# Altium PCB PCB.PcbDoc
Units mil, origin at the board's own origin, x right, y up, seen from the top; angles counter-clockwise.
Board outline 2800 x 2100 mil, 4 copper layers (Top Layer, Int1 (GND), Int2 (PWR), Bottom Layer), stack 53.912 mil thick; 61 components, 48 nets, 247 pads, 69 vias.
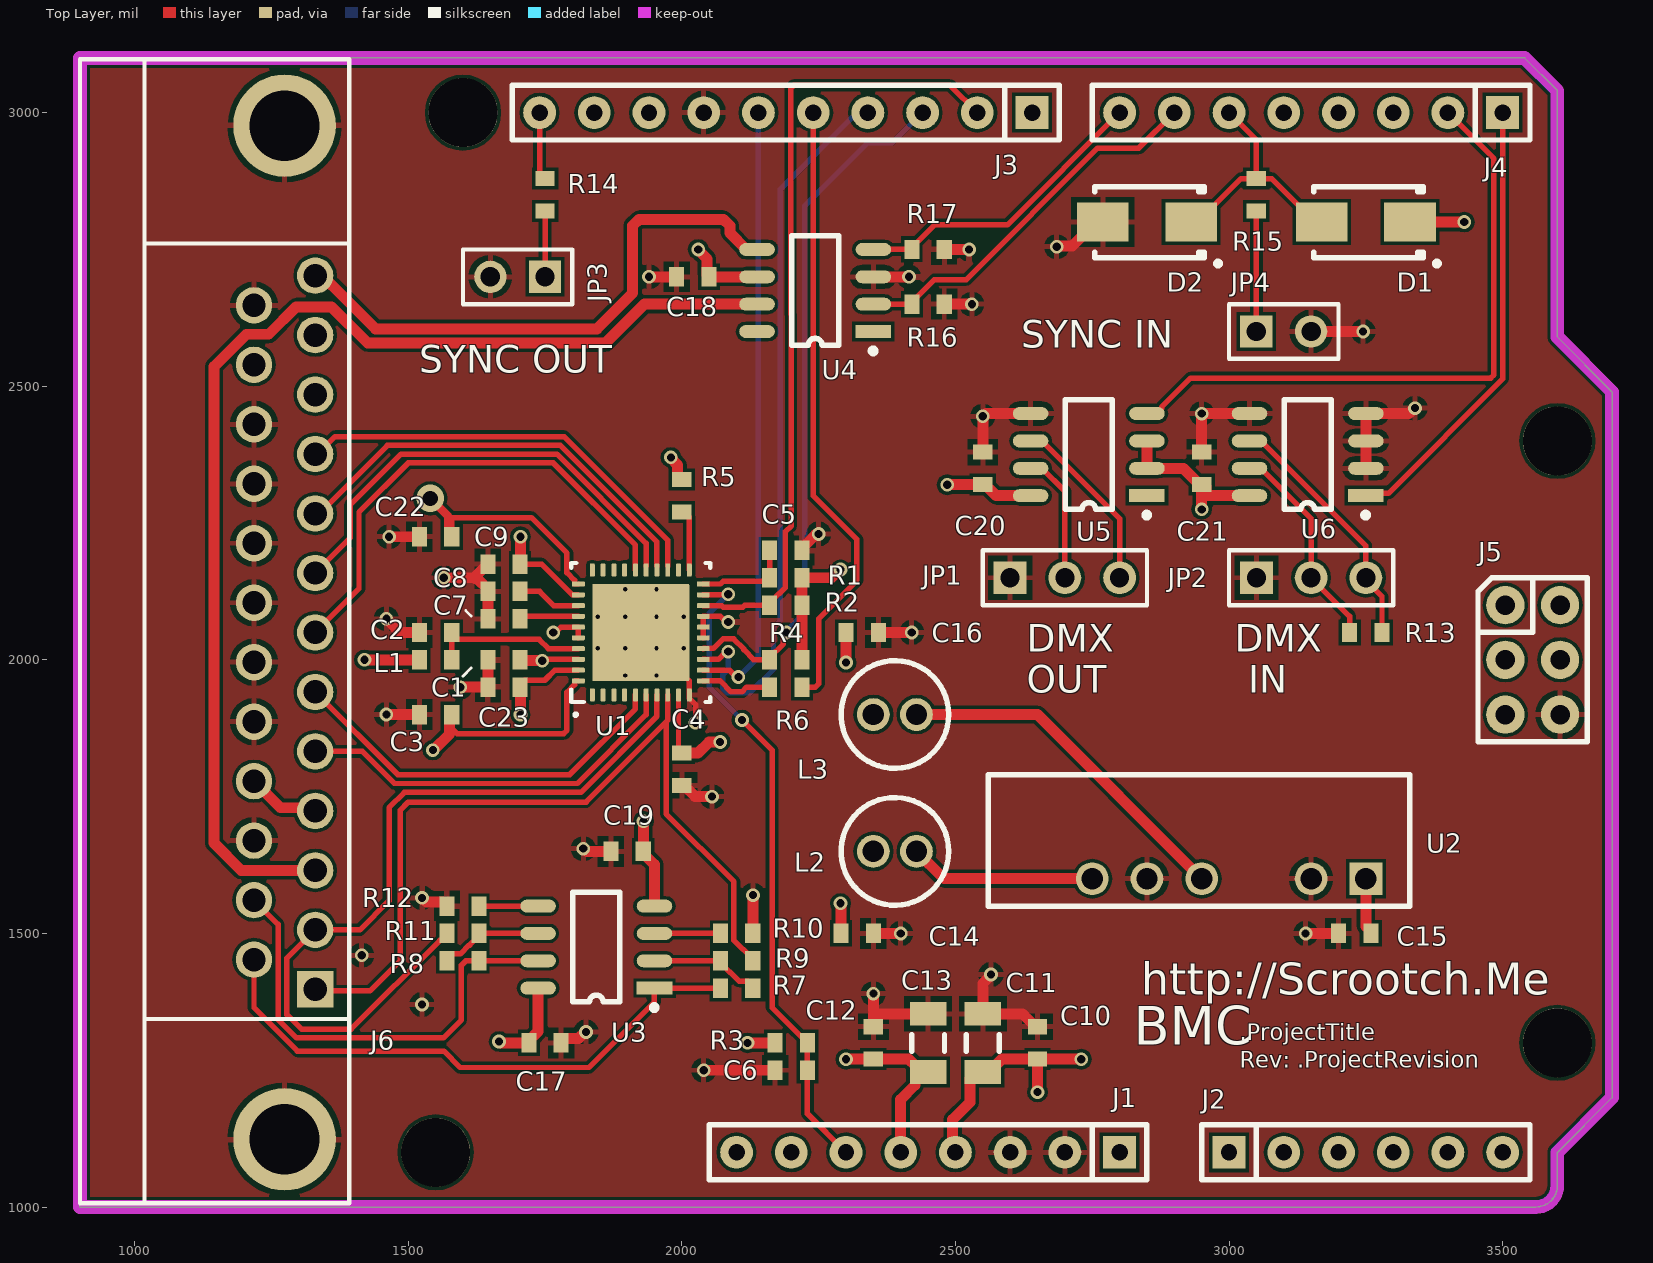
[diagram p0: Top Layer view]
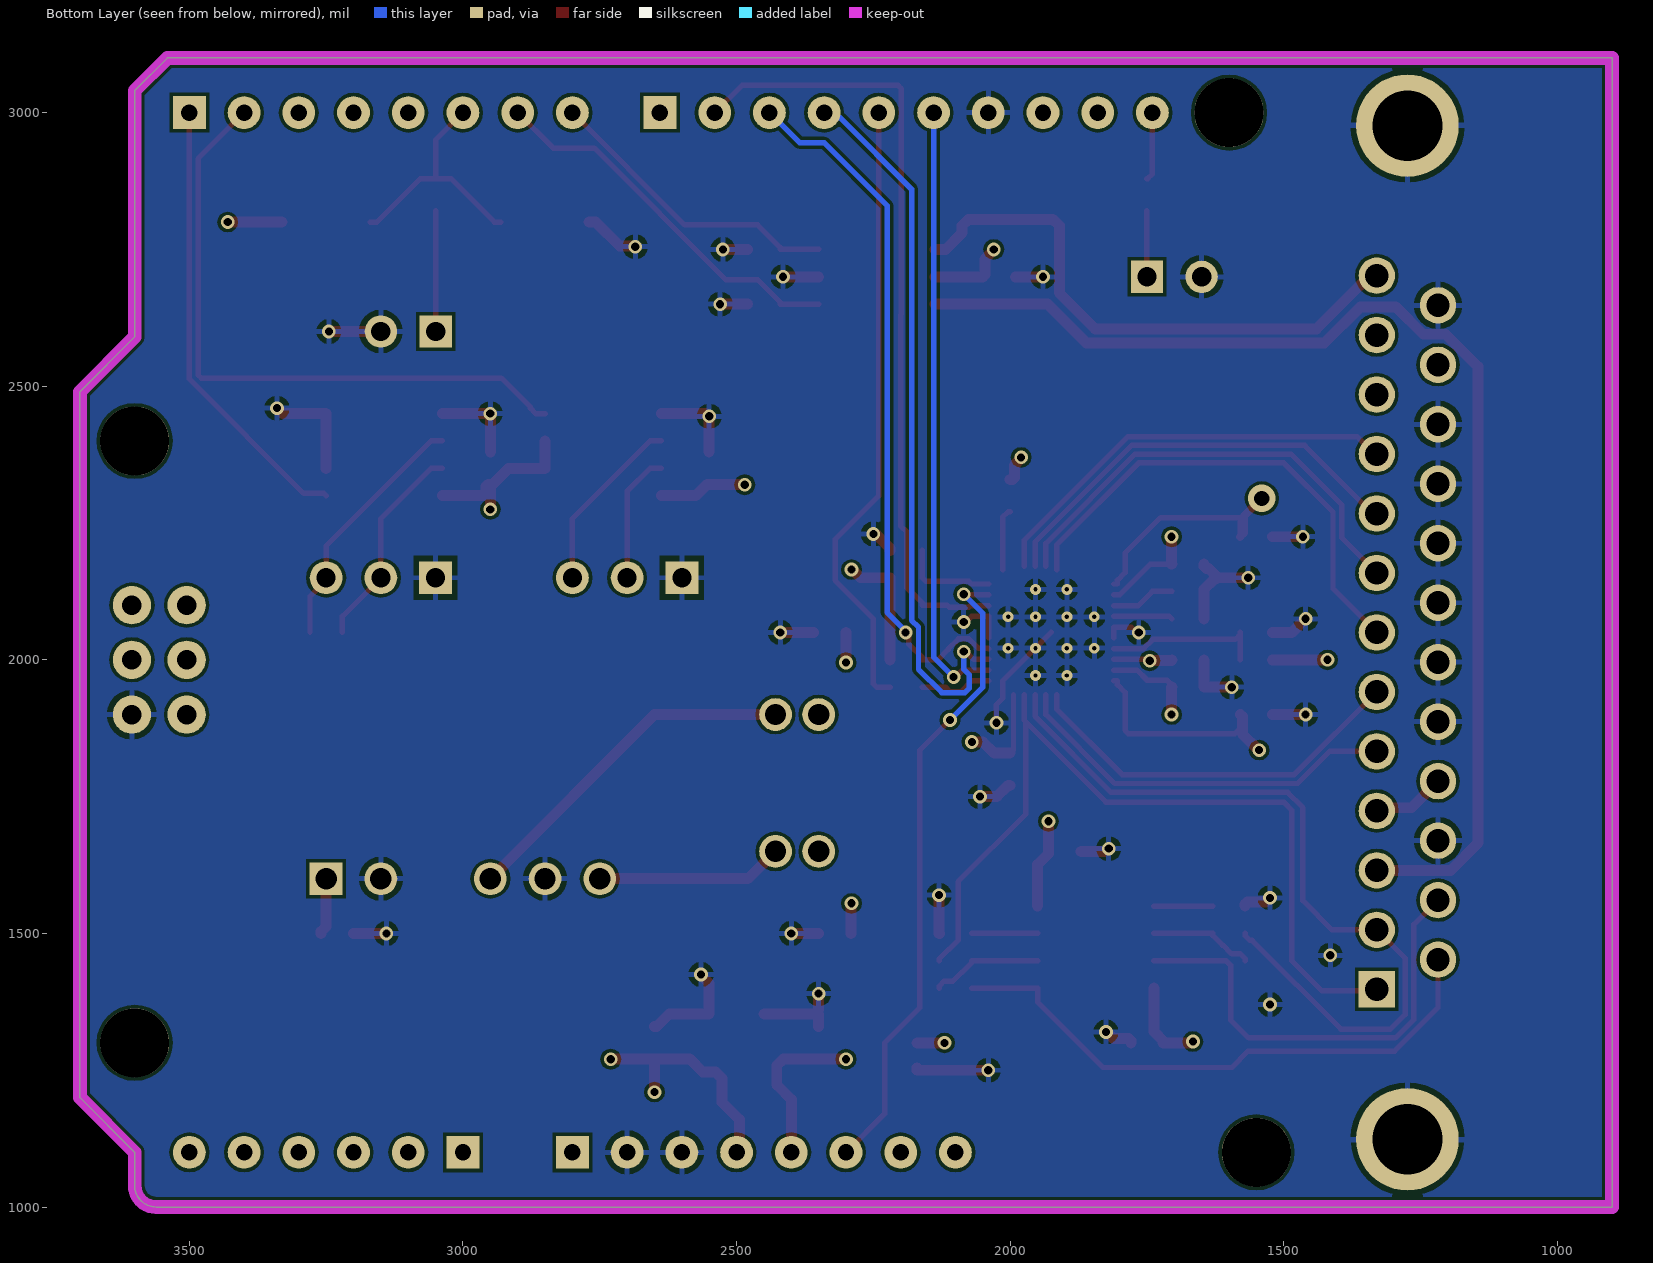
[diagram p1: Bottom Layer view, seen from below]
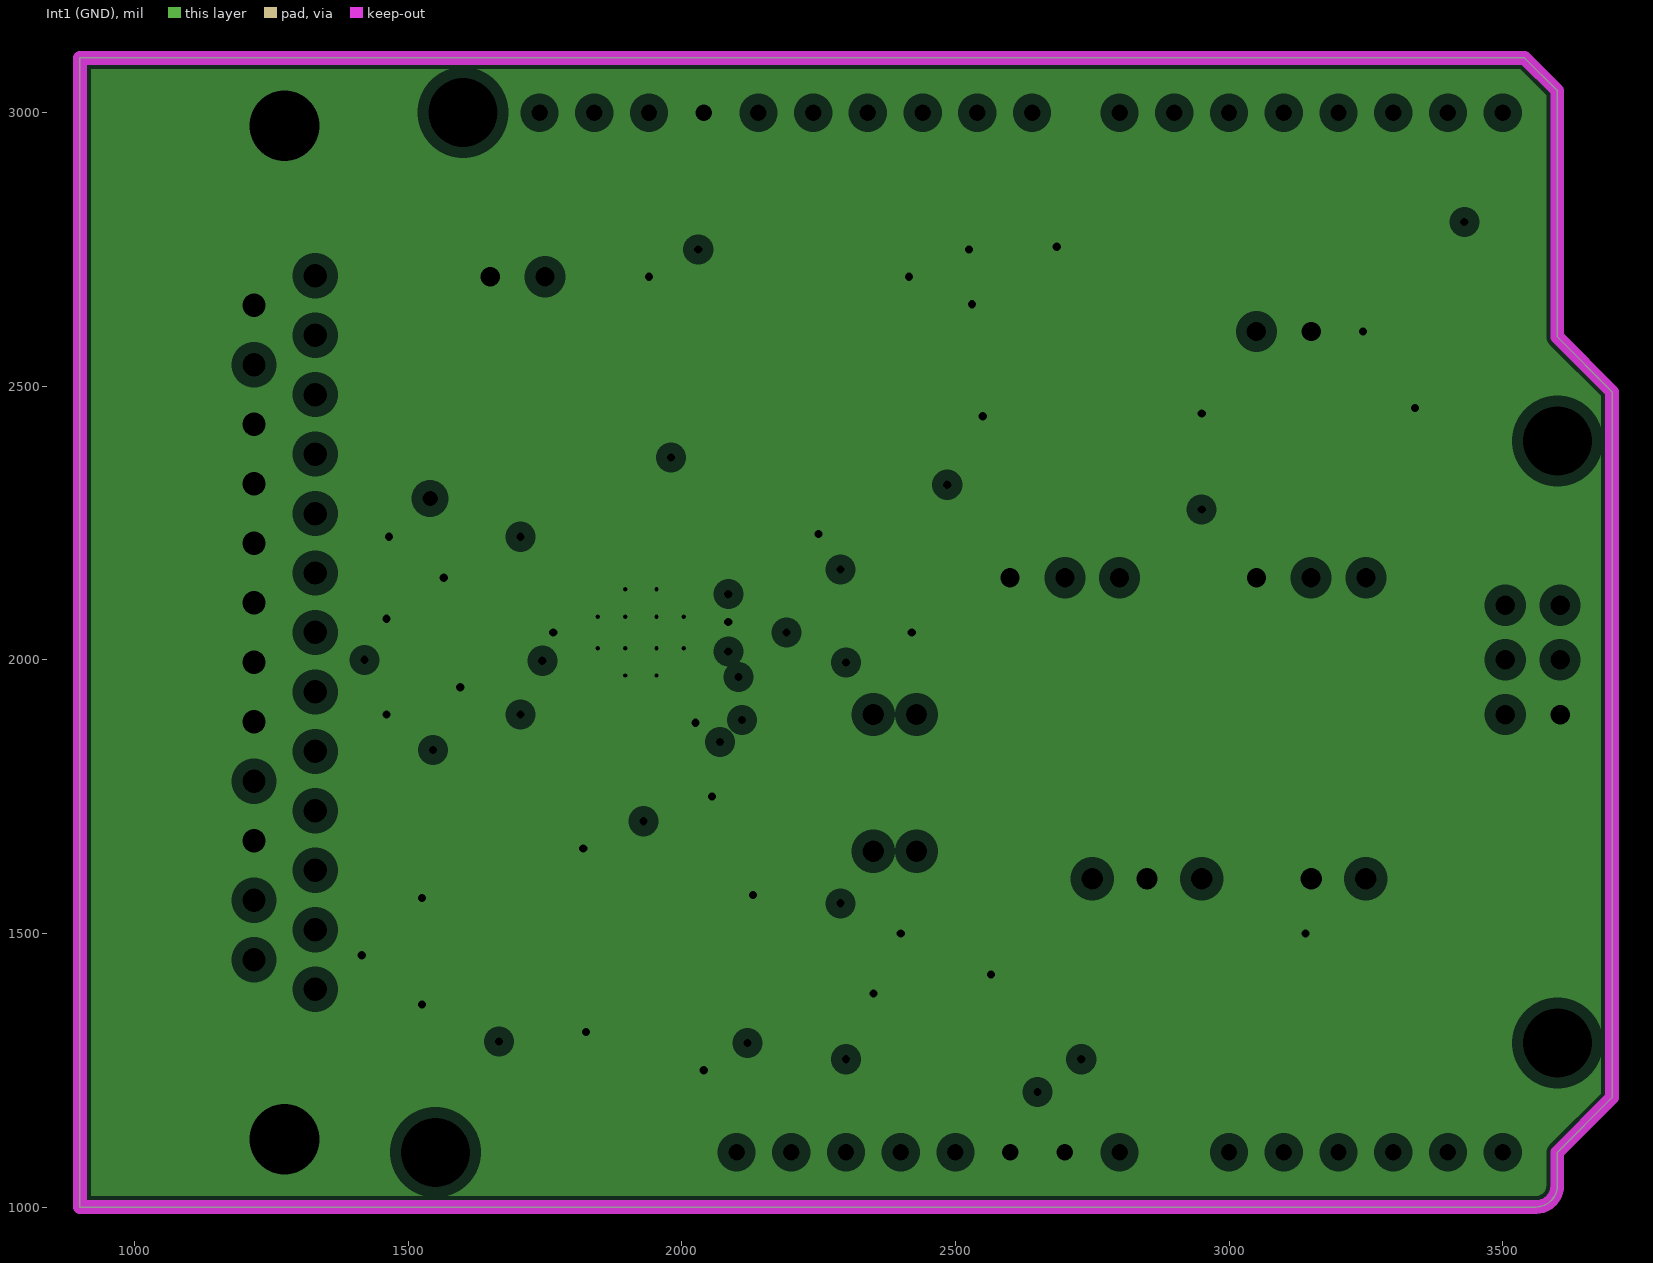
[diagram p2: Int1 (GND), clearances drawn from the general rule]
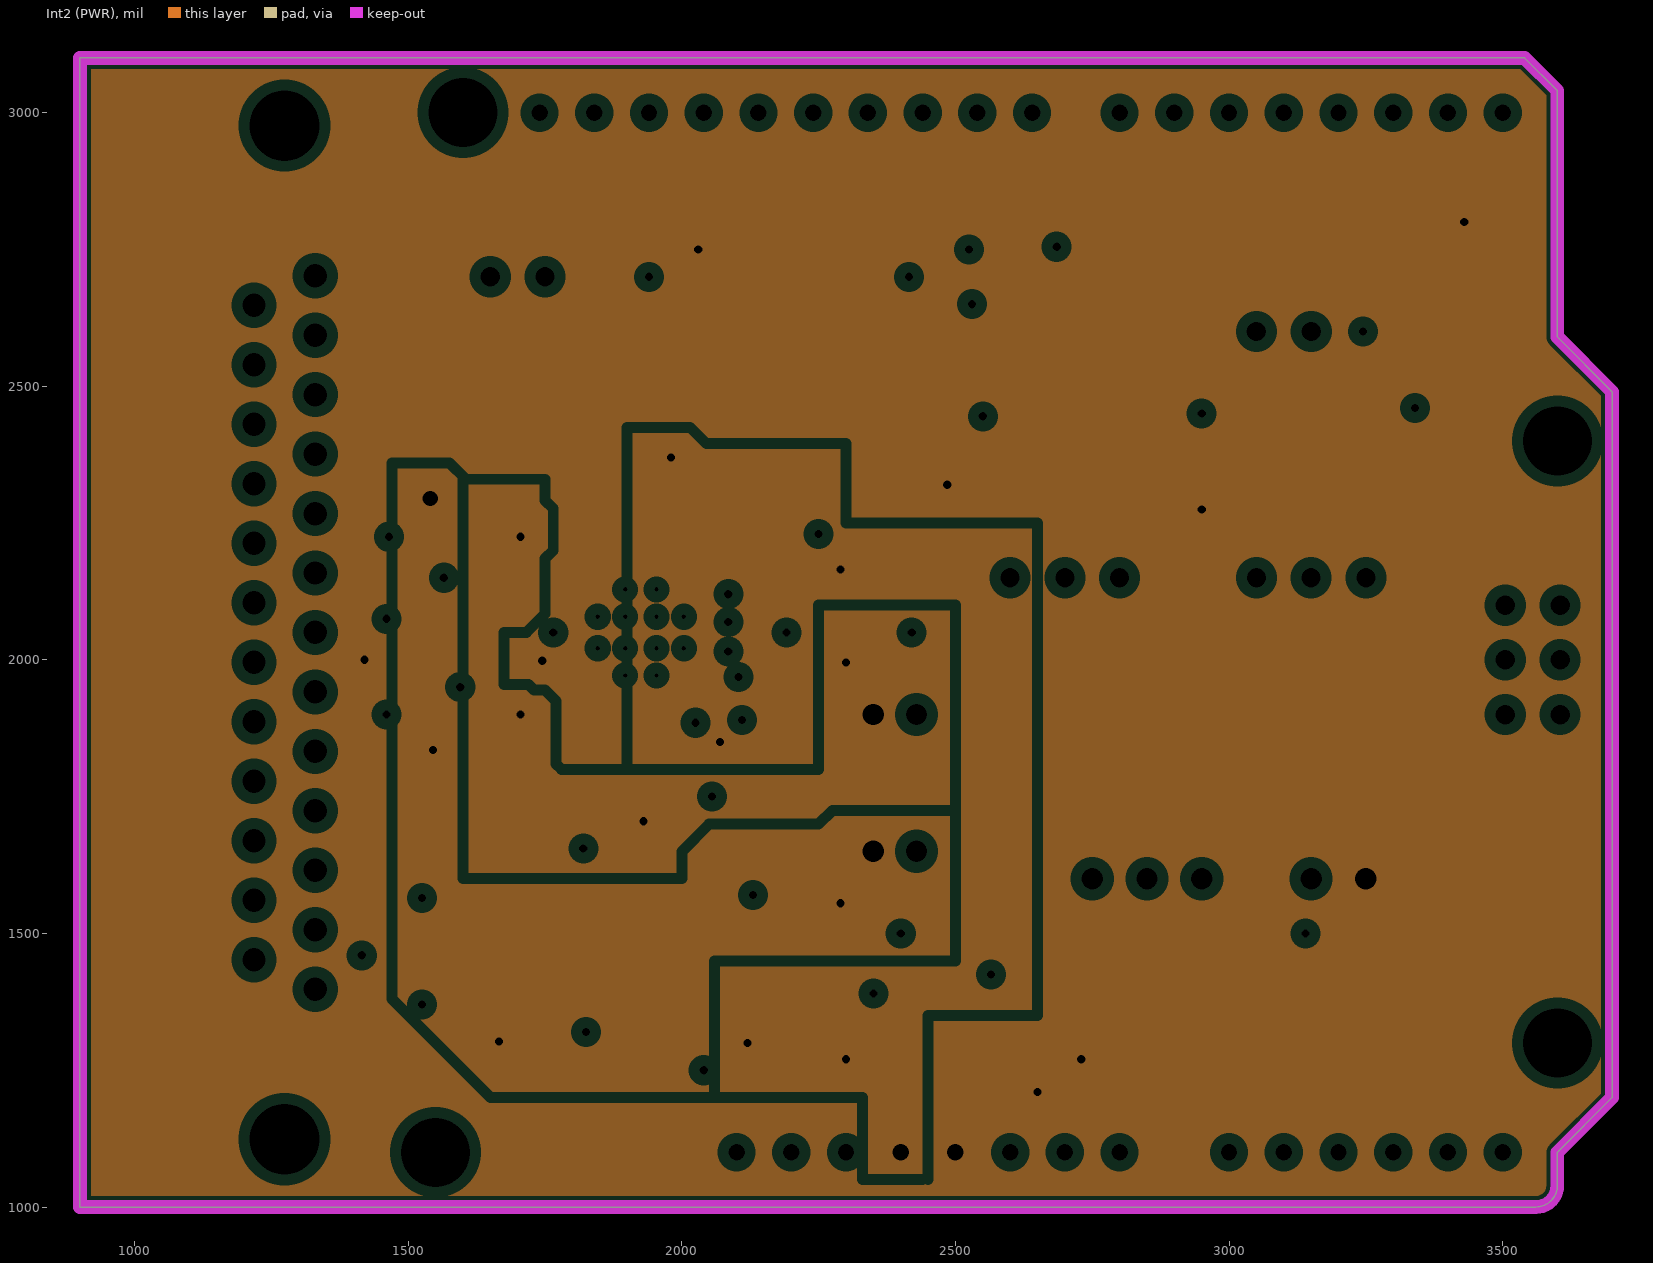
[diagram p3: Int2 (PWR), clearances drawn from the general rule]

## Layer stack, top to bottom
Top Solder: solder mask 1, SM-001, Dk 4
Top Layer: signal copper 1.378
Dielectric 1: prepreg 5.1, PP-017, Dk 4.3
Dielectric 2: prepreg 5.1, PP-017, Dk 4.3
Int1 (GND): plane copper 1.378, net GND
Dielectric 3: core 28, Core-039, Dk 4.8
Int2 (PWR): plane copper 1.378, net (Multiple Nets)
Dielectric 4: prepreg 5.1, PP-017, Dk 4.3
Dielectric 5: prepreg 5.1, PP-017, Dk 4.3
Bottom Layer: signal copper 1.378
Bottom Solder: solder mask 1, SM-001, Dk 4

## Board outline
900,1000 900,3100 3540,3100 3600,3040 3600,2590 3700,2490 3700,1200 3600,1100 3600,1039.37 cw(c3560.63,1039.37) 3560.63,1000

## Design rules (kind name [scope] priority, off if disabled: settings)
Clearance [All] p1: gap=6 ignorepadtopadclearanceinfootprint=FALSE
HoleSize [All] p1: absolutevalues=TRUE maxlimit=130 minlimit=4 maxpercent=80.000 minpercent=20.000
MinimumSolderMaskSliver [All] p1: minsoldermaskwidth=4
PlaneClearance [All] p1: clearance=20
PlaneConnect [All] p1: planeconnectstyle=Relief reliefexpansion=20 reliefentries=4 reliefconductorwidth=10 reliefairgap=10
PolygonConnect [All] p1: connectstyle=Relief reliefconductorwidth=10 reliefentries=4 polygonreliefangle="90 Angle" airgapwidth=10
RoutingVias [All] p1: holewidth=15 width=25 viastyle="Through Hole" minholewidth=7 minwidth=19 maxholewidth=28 maxwidth=50
SilkToSolderMaskClearance [IsPad] p1: minsilkscreentomaskgap=6 clearancetoexposedcopper=TRUE
SolderMaskExpansion "SolderMaskExpansion Via" [IsVia] p1: expansion=-14 istentingtop=FALSE
SolderMaskExpansion [All] p2: expansion=4 istentingtop=FALSE
Width "Width Power" [All] p1: maxlimit=50 minlimit=10 preferedwidth=20
Width [All] p2: maxlimit=20 minlimit=6 preferedwidth=10
25 further rules are at their usual default settings.

## Classes and differential pairs
net class Power: 3V3 5V 9V -9V GND

## Components (designator, comment, footprint, x,y, rotation, side; value= is the part's Value field where it differs from the comment)
C1 ".1uF" C0603 1675,2000 r180 top
C2 "1uF" C0603 1550,2050 r0 top
C3 ".1uF" C0603 1550,1900 r0 top
C4 ".1uF" C0603 2000,1800 r270 top
C5 "1uF" C0603 2190,2200 r180 top
C6 "1uF" C0603 2200,1250 r0 top
C7 "1000pF" C0603 1675,2075 r0 top
C8 ".1uF" C0603 1675,2125 r0 top
C9 ".1uF" C0603 1675,2175 r0 top
C10 ".1uF" C0603 2650,1300 r270 top
C11 "10uF" C1206 2550,1300 r270 top
C12 ".1uF" C0603 2350,1300 r270 top
C13 "10uF" C1206 2450,1300 r270 top
C14 ".47uF" C0603 2320.47,1500 r180 top
C15 ".1uF" C0603 3229.53,1500 r0 top
C16 ".47uF" C0603 2329.53,2050 r0 top
C17 ".1uF" C0603 1750,1300 r180 top
C18 ".1uF" C0603 2020,2700 r180 top
C19 ".1uF" C0603 1900,1650 r0 top
C20 ".1uF" C0603 2550,2350 r90 top
C21 ".1uF" C0603 2950,2350 r90 top
C22 ".1uF" C0603 1550,2225 r0 top
C23 ".1uF" C0603 1675,1950 r0 top
D1 "SS16-E3/61T" SMA 3250,2800 r180 top
D2 "SS16-E3/61T" SMA 2850,2800 r180 top
J1 "SSQ-108-03-G-S" "Header 8x1 8.5mm" 2800,1100 r180 top locked
J2 "SSQ-106-03-G-S" "Header 6x1 8.5mm" 3000,1100 r0 top locked
J3 "SSQ-110-03-G-S" "Header 10x1 8.5mm" 2640,3000 r180 top locked
J4 "SSQ-108-03-G-S" "Header 8x1 8.5mm" 3500,3000 r180 top locked
J5 "SSQ-103-02-G-D" ICSP 3505,2100 r0 top locked
J6 "5745783-4" DSUB25F-RA 900,2050 r90 top
JP1 "3-644456-3" "HEADER 1x3 100mil" 2600,2150 r0 top
JP2 "3-644456-3" "HEADER 1x3 100mil" 3050,2150 r0 top
JP3 "3-644456-2" "HEADER 1x2 100MIL" 1750,2700 r180 top
JP4 "3-644456-2" "HEADER 1x2 100MIL" 3050,2600 r0 top
L1 "742792651" R0603 1550,2000 r0 top
L2 "11R104C" 1100R 2428.74,1650 r180 top value=100uH
L3 "11R104C" 1100R 2428.74,1900 r180 top value=100uH
R1 "10K" R0603 2190,2150 r0 top
R2 "10K" R0603 2190,2100 r0 top
R3 "10K" R0603 2200,1300 r180 top
R4 "10K" R0603 2190,2000 r0 top
R5 "10K" R0603 2000,2300 r90 top
R6 "33" R0603 2190,1950 r180 top
R7 "10K" R0603 2100,1400 r0 top
R8 "10K" R0603 1600,1450 r180 top
R9 "10K" R0603 2100,1450 r180 top
R10 "10K" R0603 2100,1500 r180 top
R11 "10K" R0603 1600,1500 r0 top
R12 "10K" R0603 1600,1550 r0 top
R13 "470" R0603 3250,2050 r180 top
R14 "33" R0603 1750,2850 r270 top
R15 "33" R0603 3050,2850 r90 top
R16 "10K" R0603 2450,2650 r180 top
R17 "10K" R0603 2450,2750 r180 top
U1 "DAC81408RHAT" RHA0040H_V 1925,2050 r90 top
U2 "NMA0509SC" NMA-SIP 3250,1600 r180 top
U3 "TL072BCDR" SOIC8 1950,1400 r180 top
U4 "IXDN604SIA" SOIC8 2350,2600 r180 top
U5 "THVD1410DR" SOIC8 2850,2300 r180 top
U6 "THVD1410DR" SOIC8 3250,2300 r180 top

## Footprints (in the part's own frame and the unit in brackets; to place one, negate y for a bottom-side part, rotate by r counter-clockwise, add the part's x,y. Pads: shape width x height; smd on the part's side, far side on the other; paste and mask are expansions set on the pad)
1100R [mil] "Murata 1100R Series Radial Lead Inductor"
  round 60 hole 39: 1(0,0) 2(78.74,0)
  silkscreen extent -59,-98 138,98, body extent -76,-116 155,116, height 217
C0603 [mm] "Chip Capacitor, Body 1.6x0.8mm, IPC High Density"
  rect 0.7x0.9 smd: 1(-0.75,0) 2(0.75,0)
  body extent -0.85,-0.48 0.85,0.48, height 0.9
C1206 [mm] "Chip Capacitor, Body 3.2x1.6mm, IPC High Density"
  rect 1.1x1.7 smd: 1(-1.35,0) 2(1.35,0)
  silkscreen extent -0.38,-0.76 0.38,0.76, body extent -1.7,-0.9 1.7,0.9, height 1.3
DSUB25F-RA [mm] "Connector; D Subminiature; 25 Position; Right Angle; Pitch 1.385 mm"
  rect 1.69x1.69 hole 1.09: 1(-16.566,-10.92)
  round 1.69 hole 1.09: 2(-13.805,-10.92) 3(-11.044,-10.92) 4(-8.283,-10.92) 5(-5.522,-10.92) 6(-2.761,-10.92) 7(0,-10.92) 8(2.761,-10.92) 9(5.522,-10.92) 10(8.283,-10.92) 11(11.044,-10.92) 12(13.805,-10.92) 13(16.566,-10.92) 14(-15.185,-8.08) 15(-12.424,-8.08) 16(-9.663,-8.08) 17(-6.902,-8.08) 18(-4.141,-8.08) 19(-1.38,-8.08) 20(1.381,-8.08) 21(4.142,-8.08) 22(6.903,-8.08) 23(9.664,-8.08) 24(12.425,-8.08) 25(15.186,-8.08)
  round 4.76 hole 3.26: 26(-23.526,-9.5) 27(23.526,-9.5)
  silkscreen extent -26.5,-12.5 26.6,0, body extent -26.54,-12.73 26.54,6.22, height 12.55
"HEADER 1x2 100MIL" [mm] "Connector; Header; 2 Position"
  rect 1.5x1.5 hole 0.9: 1(0,0)
  round 1.5 hole 0.9: 2(2.54,0)
  silkscreen extent -1.27,-1.27 3.81,1.27, body extent -1.12,-1.17 3.66,1.17, height 10.05
"HEADER 1x3 100mil" [mil] "Connector; Header; 3 Position"
  rect 60x60 hole 35: 1(0,0)
  round 60 hole 35: 2(100,0) 3(200,0)
  silkscreen extent -50,-50 250,50, body extent -44,-46 244,46, height 396
"Header 6x1 8.5mm" [mil] "Stackable 6 pin header"
  rect 60x60 hole 30: 1(0,0)
  round 60 hole 30: 2(100,0) 3(200,0) 4(300,0) 5(400,0) 6(500,0)
  silkscreen extent -50,-50 550,50, body extent -50,-50 550,50, height 335
"Header 8x1 8.5mm" [mil] "Stackable 8 pin header"
  rect 60x60 hole 30: 1(0,0)
  round 60 hole 30: 2(100,0) 3(200,0) 4(300,0) 5(400,0) 6(500,0) 7(600,0) 8(700,0)
  silkscreen extent -50,-50 750,50, body extent -50,-50 750,50, height 335
"Header 10x1 8.5mm" [mil] "Stackable 10 pin header"
  rect 60x60 hole 30: 1(0,0)
  round 60 hole 30: 2(100,0) 3(200,0) 4(300,0) 5(400,0) 6(500,0) 7(600,0) 8(700,0) 9(800,0) 10(900,0)
  silkscreen extent -50,-50 950,50, body extent -50,-50 950,50, height 335
ICSP [mil]
  round 70 hole 35.43: 1(0,0) 2(100,0) 3(0,-100) 4(100,-100) 5(0,-200) 6(100,-200)
  silkscreen extent -50,-250 150,50, body extent -50,-250 150,50, height 485
NMA-SIP [mil] "Murata NMA Series DC-DC Converter"
  rect 60x60 hole 39: 1(0,0)
  round 60 hole 39: 2(100,0) 4(300,0) 5(400,0) 6(500,0)
  silkscreen extent -80,-190 690,50, body extent -80,-188 688,49, height 394
R0603 [mm] "Chip Resistor, Body 1.6x0.8mm, IPC High Density"
  rect 0.7x0.9 smd: 1(-0.75,0) 2(0.75,0)
  body extent -0.85,-0.48 0.85,0.48, height 0.9
RHA0040H_V [mm] "QFN, 40-Leads, Body 6x6mm, Pitch 0.5mm, Thermal Pad 4.15 x 4.15mm, TI Recommended"
  rrect43% 0.6x0.23 smd mask+0.07: 1(-2.9,2.25) 2(-2.9,1.75) 3(-2.9,1.25) 4(-2.9,0.75) 5(-2.9,0.25) 6(-2.9,-0.25) 7(-2.9,-0.75) 8(-2.9,-1.25) 9(-2.9,-1.75) 10(-2.9,-2.25) 21(2.9,-2.25) 22(2.9,-1.75) 23(2.9,-1.25) 24(2.9,-0.75) 25(2.9,-0.25) 26(2.9,0.25) 27(2.9,0.75) 28(2.9,1.25) 29(2.9,1.75) 30(2.9,2.25)
  rrect43% 0.23x0.6 smd mask+0.07: 11(-2.25,-2.9) 12(-1.75,-2.9) 13(-1.25,-2.9) 14(-0.75,-2.9) 15(-0.25,-2.9) 16(0.25,-2.9) 17(0.75,-2.9) 18(1.25,-2.9) 19(1.75,-2.9) 20(2.25,-2.9) 31(2.25,2.9) 32(1.75,2.9) 33(1.25,2.9) 34(0.75,2.9) 35(0.25,2.9) 36(-0.25,2.9) 37(-0.75,2.9) 38(-1.25,2.9) 39(-1.75,2.9) 40(-2.25,2.9)
  rrect2% 4.5x4.5 smd paste-2.5: 41(0,0)
  silkscreen extent -3.84,-3.22 3.22,3.22, body extent -3.08,-3.08 3.08,3.08, height 1.01
SMA [mm] "DO-214-AC/SMA; 2 C-Bend Leads; Body 5 x 2.7 mm, inc. leads (LxW)"
  rect 2.4x1.8 smd: 1(-2.05,0) 2(2.05,0)
  silkscreen extent -3.4,-1.65 2.41,2.02, body extent -2.29,-1.4 2.29,1.4, height 2.29
SOIC8 [mm]
  rect 1.651x0.6 smd: 1(0,0)
  oval 1.651x0.6 smd: 2(0,-1.27) 3(0,-2.54) 4(0,-3.81) 5(5.4,-3.81) 6(5.4,-2.54) 7(5.4,-1.27) 8(5.4,0)
  silkscreen extent -0.11,-4.44 3.79,1.03, body extent -0.33,-4.36 5.67,0.54, height 1.75

## Part data
C1 C3 C4 C8 C9 C10 C12 C15 C17 C18 C19 C20 C21 C22 C23: library part CAP_CER_0.1UF_50V_X7R_0603, "0.1µF ±10% 50V Ceramic Capacitor X7R 0603 (1608 Metric)", Supplier Part Number 1=399-5089-1-ND, ComponentLink1Description=Datasheet, ComponentLink1URL=https://content.kemet.com/datasheets/KEM_C1002_X7R_SMD.pdf, Supplier 1=Digi-Key
C2 C5 C6: library part CAP_CER_1UF_25V_X7R_0603, "1µF ±10% 25V Ceramic Capacitor X7R 0603 (1608 Metric)", Supplier Part Number 1=399-7376-1-ND, ComponentLink1Description=Datasheet, ComponentLink1URL=https://api.kemet.com/component-edge/download/datasheet/C0603C105K3RACTU.pdf, Supplier 1=Digi-Key
C7: library part CAP_CER_1000PF_50V_X7R_0603, "1000pF ±10% 50V Ceramic Capacitor X7R 0603 (1608 Metric)", Supplier Part Number 1=399-1082-1-ND, ComponentLink1Description=Datasheet, ComponentLink1URL=https://api.kemet.com/component-edge/download/datasheet/C0603C105K3RACTU.pdf, Supplier 1=Digi-Key
C11 C13: library part CAP_CER_10UF_50V_X5R_1206, "10µF ±10% 50V Ceramic Capacitor X5R 1206 (3216 Metric)", Supplier Part Number 1=1276-2876-1-ND, ComponentLink1Description=http://www.samsungsem.com/kr/front/downloadcms.do?path=/kr/support/product-search/mlcc/__icsFiles/afieldfile/2015/04/16&fileName=CL31A106KBHNNNE.pdf, ComponentLink1URL=http://weblib.samsungsem.com/mlcc/mlcc-ec-data-sheet.do?partNumber=CL31A106KBHNNN, Supplier 1=Digi-Key
C14 C16: library part CAP_CER_0.47UF_25V_X5R_0805, "0.47µF ±10% 25V Ceramic Capacitor X5R 0805 (2012 Metric)", Supplier Part Number 1=587-1290-1-ND, ComponentLink1Description=Datasheet, ComponentLink1URL=https://ds.yuden.co.jp/TYCOMPAS/ut/detail?pn=TMK212BJ474KD-T%20%20&u=M, Supplier 1=Digi-Key
D1 D2: library part DIODE_SCHOTTKY_SS16-E3/61T, "Diode Schottky 60V 1A Surface Mount DO-214AC (SMA)", Supplier Part Number 1=SS16-E3/61TGICT-ND, ComponentLink1Description=Datasheet, ComponentLink1URL=https://www.vishay.com/docs/88746/ss12.pdf, Supplier 1=Digi-Key
J1: library part CONN_UNO-POWER, "8 Position Receptacle Connector , .1\", Gold, Through Hole", Supplier Part Number 1=SAM1198-08-ND, ComponentLink1Description=Datasheet, ComponentLink1URL=http://suddendocs.samtec.com/catalog_english/ssq_th.pdf, Supplier 1=Digi-Key
J2: library part CONN_UNO-AD, "6 Position Receptacle Connector, .1\", Gold, Through Hole", Supplier Part Number 1=SAM1198-06-ND, ComponentLink1Description=Datasheet, ComponentLink1URL=http://suddendocs.samtec.com/catalog_english/ssq_th.pdf, Supplier 1=Digi-Key
J3: library part CONN_UNO-IOH, "10 Position Receptacle Connector, .1\", Gold, Through Hole", Supplier Part Number 1=SAM1198-10-ND, ComponentLink1Description=Datasheet, ComponentLink1URL=http://suddendocs.samtec.com/catalog_english/ssq_th.pdf, Supplier 1=Digi-Key
J4: library part CONN_UNO-IOL, "8 Position Receptacle Connector , .1\", Gold, Through Hole", Supplier Part Number 1=SAM1198-08-ND, ComponentLink1Description=Datasheet, ComponentLink1URL=http://suddendocs.samtec.com/catalog_english/ssq_th.pdf, Supplier 1=Digi-Key
J5: library part CONN_UNO-ICSP, "6 Position (2x3) Receptacle Connector, .1\", Gold, Through Hole", Supplier Part Number 1=SAM1185-03-ND, Supplier 1=Digi-Key
J6: library part CONN_DSUB25F-RA, "25 Position D-Sub Receptacle, Female Sockets Connector", Supplier Part Number 1=A32077-ND, ComponentLink1Description=Drawing, ComponentLink1URL=https://www.te.com/commerce/DocumentDelivery/DDEController?Action=srchrtrv&DocNm=5745783&DocType=Customer+Drawing&DocLang=English, Supplier 1=Digi-Key
JP1 JP2: library part CONN_HEADER_VERT_3POS_2.54MM, "Connector Header Through Hole 3 position 0.100\" (2.54mm)", Supplier Part Number 1=A31113-ND, ComponentLink1Description=Datasheet, ComponentLink1URL=http://documents.tycoelectronics.com/commerce/DocumentDelivery/DDEController?Action=srchrtrv&DocNm=644456&DocType=CD&DocLang=EN, ComponentLink2Description="Product Page", ComponentLink2URL=http://www.te.com/catalog/products/en?q=3-644456-3, ComponentLink3Description="TE Connectivity Home", ComponentLink3URL=http://www.te.com, Supplier 1=Digi-Key
JP3 JP4: library part CONN_HEADER_VERT_2POS_2.54MM, "Connector Header Through Hole 2 position 0.100\" (2.54mm)", Supplier Part Number 1=A31112-ND, ComponentLink1Description=Datasheet, ComponentLink1URL=http://documents.tycoelectronics.com/commerce/DocumentDelivery/DDEController?Action=srchrtrv&DocNm=644456&DocType=CD&DocLang=EN, ComponentLink2Description="Product Page", ComponentLink2URL=http://www.te.com/catalog/products/en?q=3-644456-2, ComponentLink3Description="TE Connectivity Home", ComponentLink3URL=http://www.te.com, Supplier 1=Digi-Key
L1: library part IND_742792651, "600 Ohms @ 100MHz 1 Signal Line Ferrite Bead 0603 (1608 Metric) 1A 200mOhm", Supplier Part Number 1=732-1593-1-ND, ComponentLink1Description=Datasheet, ComponentLink1URL=https://katalog.we-online.de/pbs/datasheet/742792651.pdf, Supplier 1=Digi-Key
L2 L3: library part IND_11R104C, "100µH Unshielded Wirewound Inductor 350mA 1.1Ohm Max Radial, Vertical Cylinder", Supplier Part Number 1=811-2030-ND, ComponentLink1Description=Datasheet, ComponentLink1URL=https://www.murata-ps.com/pub/data/magnetics/kmp_1100r.pdf, Supplier 1=Digi-Key
R1 R2 R3 R4 R5 R7 R8 R9 R10 R11 R12 R16 R17: library part RES_SMD_10K_OHM_1P_.1W_0603, "10 kOhms ±1% 0.1W, 1/10W Chip Resistor 0603 (1608 Metric) Automotive AEC-Q200 Thick Film", Supplier Part Number 1=P10.0KHCT-ND, ComponentLink1Description=Datasheet, ComponentLink1URL=https://industrial.panasonic.com/cdbs/www-data/pdf/RDA0000/AOA0000C304.pdf, Supplier 1=Digi-Key
R6 R14 R15: library part RES_SMD_33_OHM_1P_.1W_0603, "33 Ohms ±1% 0.1W, 1/10W Chip Resistor 0603 (1608 Metric) Automotive AEC-Q200 Thick Film", Supplier Part Number 1=541-CRCW060333R0FKEBCT-ND, ComponentLink1Description=Datasheet, ComponentLink1URL=http://www.vishay.com/docs/20035/dcrcwe3.pdf, Supplier 1=Digi-Key
R13: library part RES_SMD_470_OHM_1P_.1W_0603, "470 Ohms ±1% 0.1W, 1/10W Chip Resistor 0603 (1608 Metric) Automotive AEC-Q200 Thick Film", Supplier Part Number 1=P470HCT-ND, ComponentLink1Description=Datasheet, ComponentLink1URL=https://industrial.panasonic.com/cdbs/www-data/pdf/RDA0000/AOA0000C304.pdf, Supplier 1=Digi-Key
U1: library part IC_DAC_DAC81408RHAT, "16 Bit Digital to Analog Converter 8 channel 40-VQFN (6x6)", Supplier Part Number 1=296-53466-1-ND, ComponentLink1Description=Datasheet, ComponentLink1URL=https://www.ti.com/lit/ds/symlink/dac81408.pdf?ts=1592954158216&ref_url=https%253A%252F%252Fwww.ti.com%252Fproduct%252FDAC81408, Supplier 1=Digi-Key
U2: library part REG_NMA0509SC, "Isolated Module DC DC Converter 2 Output 9V -9V   55mA, 55mA 4.5V - 5.5V Input", Supplier Part Number 1=811-1449-5-ND, ComponentLink1Description=Datasheet, ComponentLink1URL=https://www.murata.com/products/productdata/8807031013406/kdc-nma.pdf?1583754812000, Supplier 1=Digi-Key
U3: library part "IC_OPAMP_JFET_2 CH_8SOIC", "J-FET Amplifier 2 Circuit  8-SOIC", Supplier Part Number 1=296-14996-1-ND, ComponentLink1Description="Manufacturer URL", ComponentLink1URL=http://www.ti.com/, ComponentLink2Description=Datasheet, ComponentLink2URL=http://www.ti.com/lit/ds/symlink/tl072b.pdf, ComponentLink3Description="Package Specification", ComponentLink3URL=http://www.ti.com/litv/pdf/msoi002j, Supplier 1=Digi-Key
U4: library part IC_DRVR_IXDN604SIA, "Low-Side Gate Driver IC Non-Inverting 8-SOIC", Supplier Part Number 1=212-IXDN604SIACT-ND, ComponentLink1Description=Datasheet, ComponentLink1URL=http://www.ixysic.com/home/pdfs.nsf/www/IXD_604.pdf/$file/IXD_604.pdf, Supplier 1=Digi-Key
U5 U6: library part IC_TRANS_THVD1410DR, "Transceiver 1ch Half RS485 8-SOIC", Supplier Part Number 1=296-THVD1410DRCT-ND, ComponentLink1Description=Datasheet, ComponentLink1URL=https://www.ti.com/lit/ds/symlink/thvd1410.pdf?HQS=TI-null-null-digikeymode-df-pf-null-wwe&ts=1593548093817, Supplier 1=Digi-Key

## Free pads (board coordinates)
  round 126 hole 126 unplated: MH1(3600,2400) MH2(3600,1300) MH3(1600,3000) MH4(1550,1100)

## Via types
v1: diameter 25, hole 15, Top Layer to Bottom Layer, 56 vias
v2: diameter 19.68, hole 7.87, Top Layer to Bottom Layer, 12 vias
v3: diameter 50, hole 28, Top Layer to Bottom Layer, 1 vias

## Nets (pads, with @x,y where several pads share a name; then routed paths per layer and width w, separated by ;. In a path a pad name is that pad's centre, name@x,y a point inside that pad or via, vN(x,y) a via of type N, cw(c..) or ccw(c..) an arc to the next point about the centre after c; other vN are vias at no path point)
3V3: C4.1 C12.2 C13.2 J1.5 R1.2 R2.2 R3.2 R4.2 R5.2 U1.9 | length 816.7
  Top Layer w10: U1.9 1993.9,1835.63 C4.1
  Top Layer w20: v1(1980,2370) 1980,2368.65 1992.28,2356.36 1992.28,2333.31 1996.06,2329.53 R5.2 ; C4.1 2029.53,1829.53 2050,1850 v1(2070,1850) ; v1(2120,1300) R3.2 ; R4.2 R2.2 R1.2 2273.65,2150 2288.65,2165 v1(2290,2165) ; v1(2300,1270) 2300.24,1270.24 2349.76,1270.24 C12.2 2414.57,1270.47 2426.54,1258.5 2426.54,1223.39 2400,1196.85 J1.5
5V: C1.1 C10.2 C11.2 C15.2 C18.1 C20.1 C21.1 D1.1 J1.4 L1.1 U1.38 U2.1 U4.6 U5.2 U5.3 U5.8 U6.8 | length 1460
  Top Layer w10: v1@1745,2000.79 U1.38
  Top Layer w20: v1(1420,2000) L1.1 ; C1.1 1705.38,1999.14 1744.14,1999.14 v1(1745,1998.29) ; v1(2030,2750) 2030,2748.65 2045.75,2732.9 2045.75,2703.78 C18.1 U4.6 ; v1(2485,2320) 2485.24,2320.24 2549.76,2320.24 C20.1 2553.94,2320.47 2574.41,2300 U5.8 ; J1.4 2495,1105 2495,1160 2526.54,1191.54 2526.54,1235.2 2538.19,1246.85 C11.2 2561.81,1246.85 2585.43,1270.47 C10.2 ; v1(2650,1210) C10.2 ; v1(2730,1270) 2729.76,1270.24 2650.24,1270.24 C10.2 ; U5.3 U5.2 2916.54,2350 2946.06,2320.47 C21.1 ; v1(2950,2275) C21.1 ; U6.8 2957.72,2300 2957.72,2316.69 2953.94,2320.47 C21.1 ; U2.1 3250,1512.99 3259.06,1503.94 C15.2 ; D1.1 v1(3430,2800)
9V: C3.2 C14.2 C17.2 C22.2 L2.2 U1.31 U1.40 U3.8 | length 1070.1
  Top Layer w10: C3.2 1579.53,1874.76 1589.29,1865 1784.14,1865 1790,1870.86 1790,1940.59 1804.02,1954.61 1804.02,1960.94 1804.49,1961.42 U1.40 ; C22.2 1579.53,2259.08 1580.45,2260 1725,2260 1790,2195 1790,2159.41 1804.02,2145.39 1804.02,2139.06 1804.49,2138.58 U1.31
  Top Layer w15: v3(1540,2295) 1573.25,2261.75 1573.25,2231.28 C22.2
  Top Layer w20: v1(1545,1835) 1546.35,1835 1575.75,1864.39 1575.75,1896.22 C3.2 ; v1(1665.99,1302.5) 1667.34,1302.5 1669.84,1300 1716.69,1300 C17.2 1720.47,1303.94 1737.4,1320.87 U3.8 ; v1(2290,1555) 2290.47,1554.53 2290.47,1500.47 C14.2
-9V: C9.2 C16.1 C19.2 C23.2 L3.2 U1.32 U1.39 U3.4 | length 570.1
  Top Layer w10: C23.2 1704.53,1953.94 1713.31,1962.72 1749.47,1962.72 1767.85,1981.1 U1.39 ; C9.2 1743.65,2175 1760,2158.66 1799.29,2119.37 1810.35,2119.37 U1.32
  Top Layer w20: C23.2 1704.76,1949.76 1704.76,1900.24 v1(1705,1900) ; C9.2 1704.76,2175.24 1704.76,2224.76 v1(1705,2225) ; v1(1930,1705) 1929.76,1704.76 1929.76,1650.24 C19.2 1929.53,1646.06 1950,1625.59 U3.4 ; v1(2300,1995) C16.1
/LDAC: J3.2 R2.1 U1.18 | length 1449.5
  Top Layer w10: U1.18 2072.55,2099.21 2075.27,2096.5 2111.73,2096.5 2115.23,2100 R2.1 2160.47,2103.94 2177.82,2121.28 2178.81,2121.28 2189.4,2131.88 2189.4,2234.4 2200,2245 2200,2630.49 2199,2631.49 2199,3044.14 2204.86,3050 2490,3050 J3.2
/NSS: J3.3 R4.1 U1.14 | length 1287.8
  Top Layer w10: U1.14 2039.65,2020.94 2057.71,2020.94 2075.27,2038.5 2094.73,2038.5 2113.21,2020.02 2113.21,2018.48 2131.69,2000 R4.1 2160.47,2003.94 2185.63,2029.09 2185.63,2044.6 v1(2191.03,2050)
  Bottom Layer w10: v1(2191.03,2050) 2191.03,2052.53 2225,2086.5 2225,2830 2340,2945 2385,2945 J3.3
/RST: C6.2 J1.6 R3.1 U1.19 | length 1184.3
  Top Layer w10: U1.19 2039.65,2119.37 2084.37,2119.37 v1(2085,2120) ; v1(2110,1890) 2165,1835 2165,1364.53 R3.1 C6.2 2229.53,1170.47 J1.6
  Bottom Layer w10: v1(2085,2120) 2050,2085 2050,1950 v1(2110,1890)
B_OUT: J6.7 U1.26 | length 903.5
  Top Layer w10: J6.7 1410,2130.08 1410,2270 1500,2360 1765,2360 1915.16,2209.84 U1.26
BLANK: J4.7 R16.2 U4.2 | length 697.3
  Top Layer w10: U4.2 R16.2 2420.47,2653.94 2461.54,2695 2520,2695 2760,2935 2835,2935 J4.7
BLANK_DRV: J6.3 U4.7 | length 2170.7
  Top Layer w20: J6.3 1194.8,1615.2 1145,1665 1145,2535.72 1204.28,2595 1245,2595 1295,2645 1360,2645 1426,2579 1860.77,2579 1931.77,2650 U4.7
C4_OUT: J6.8 U1.25 | length 839.6
  Top Layer w10: J6.8 1394,2222.78 1394,2283 1487,2376 1771.63,2376 1934.84,2212.78 U1.25@1934.84,2170.98
C5_OUT: J6.9 U1.24 | length 794
  Top Layer w10: J6.9 1337.4,2267.4 1462,2392 1778.25,2392 1954.53,2215.73 U1.24@1954.53,2170.98
C6_OUT: J6.10 U1.23 | length 783.6
  Top Layer w10: J6.10 1334.39,2376.1 1366.28,2408 1784.88,2408 1974.21,2218.67 U1.23@1974.21,2170.98
DMX_RX: J4.1 U6.1 | length 825.1
  Top Layer w10: U6.1 3254.38,2304.38 3291.15,2304.38 3500,2513.23 J4.1
DMX_TX: J4.2 U5.4 | length 1178.5
  Top Layer w10: U5.4 2867,2450 2876.8,2459.8 2876.8,2461.8 2930,2515 3478.14,2515 3484,2520.86 3484,2916 J4.2
G_OUT: J6.6 U1.5 | length 723.3
  Top Layer w10: J6.6 1481.22,1790 1795,1790 1915.16,1910.16 U1.5
GND: C1.2 C2.1 C3.1 C4.2 C5.1 C6.1 C7.1 C8.1 C9.1 C10.1 C11.1 C12.1 C13.1 C14.1 C15.1 C16.2 C17.1 C18.2 C19.1 C20.2 C21.2 C22.1 C23.1 D2.2 J1.2 J1.3 J3.7 J5.6 J6.16 J6.18 J6.19 J6.20 J6.21 J6.22 J6.23 J6.25 J6.26 J6.27 JP1.1 JP2.1 JP3.2 JP4.2 R10.1 R12.1 R16.1 R17.1 U1.10 U1.15 U1.16 U1.17 U1.35 U1.36 U1.41 U2.2 U2.5 U4.3 U5.5 U6.2 U6.3 U6.4 U6.5 | length 2743.3
  Top Layer w10: v1(1765,2050) 1769.06,2050 1778.9,2059.84 U1.35 U1.36 ; U1.41 v2(1953.64,2021.36) 2013.58,1961.42 U1.10 2013.58,1929.49 2025,1918.07 v1(2025,1885) ; U1.15 U1.16 U1.17 2070.41,2079.53 2080.94,2069 v1(2085,2069)
  Top Layer w20: v1(1460,1900) C3.1 ; v1(1460,2075) 1485,2050 C2.1 ; v1(1465,2225) C22.1 ; v1(1525,1565) 1526.35,1565 1533.64,1557.72 1566.69,1557.72 1570.47,1553.94 R12.1 ; v1(1565,2150) 1620.47,2150 ; v1(1595,1950) C23.1 C1.2 ; C7.1 C8.1 1645.47,2128.94 1625.72,2148.69 1621.79,2148.69 1620.47,2150 ; C9.1 1645.47,2171.06 1641.69,2167.28 1637.76,2167.28 1620.47,2150 ; C17.1 1779.53,1303.94 1783.31,1307.72 1811.36,1307.72 1823.65,1320 v1(1825,1320) ; v1(1820,1655) 1821.35,1655 1826.35,1650 C19.1 ; v1(1940,2700) C18.2 ; C4.2 2003.94,1770.47 2024.41,1750 v1(2055,1750) ; v1(2040,1250) 2166.69,1250 C6.1@2170.47,1253.78 ; R10.1 2129.76,1500.24 2129.76,1569.76 v1(2130,1570) ; C6.1 C6.1@2170.47,1253.78 ; C6.1@2170.47,1254.57 C6.1@2170.47,1253.78 ; C5.1 2219.53,2203.94 2244.63,2229.04 2249.04,2229.04 v1(2250,2230) ; C12.1 2350,1353.15 ; v1(2350,1390) 2350,1360 2356.85,1353.15 C13.1 ; C14.1 v1(2400,1500) ; U4.3 v1(2415,2700) ; C16.2 v1(2420,2050) ; R16.1 v1(2530,2650) ; R17.1 v1(2525,2750) ; C20.2 v1(2550,2445) 2551.35,2445 2556.35,2450 U5.5 ; v1(2565,1425) 2565,1423.65 2550,1408.65 C11.1 2622.44,1353.15 2646.06,1329.53 C10.1 ; v1(2685,2755) 2685.96,2755.96 2713.44,2755.96 2757.48,2800 D2.2 ; C21.2 v1(2950,2450) U6.5 ; v1(3140,1500) C15.1 ; JP4.2 v1(3245,2600) ; U6.2 U6.3 U6.4 3328.65,2450 3338.65,2460 v1(3340,2460)
  other v1: 1525,1370 1415,1460
  other v2: 1896.36,1971.26 1953.64,1971.26 1846.26,2021.36 1896.36,2021.36 2003.74,2021.36 1846.26,2078.64 1896.36,2078.64 1953.64,2078.64 2003.74,2078.64 1896.36,2128.74 1953.64,2128.74
MISO: J3.5 R6.1 | length 1139.2
  Top Layer w10: R6.1 2244.14,1950 2250,1955.86 2250,2075 2320,2145 2320,2220 2240,2300 J3.5
MOSI: J3.4 U1.13 | length 1337.2
  Top Layer w10: U1.13 2066.73,2000.79 2080.94,2015 v1(2085,2015)
  Bottom Layer w10: v1(2085,2015) 2085,1983.23 2075,1973.23 2075,1947.63 2082.63,1940 2125,1940 2167.53,1982.53 2167.53,2059.73 2180,2072.21 2180,2860 2310.43,2990.43 2330.43,2990.43 J3.4
NetC2_2: C2.2 L1.2 U1.37 | length 291.9
  Top Layer w10: L1.2 C2.2@1579.53,2046.06 ; C2.2 C2.2@1579.53,2046.06 ; U1.37 1756.05,2020.47 1739.24,2037.28 1588.31,2037.28 C2.2@1579.53,2046.06
NetC5_2: C5.2 R1.1 U1.20 | length 176
  Top Layer w10: U1.20 2070.35,2138.58 2075.27,2143.5 2153.97,2143.5 R1.1 C5.2
NetC7_2: C7.2 U1.34 | length 108.2
  Top Layer w10: C7.2 1709.06,2079.53 U1.34
NetC8_2: C8.2 U1.33 | length 117
  Top Layer w10: C8.2 1740,2125 1765.79,2099.21 U1.33
NetJ6_4: J6.4 J6.17 | length 134.3
  Top Layer w20: J6.17 1266.65,1729.7 1324.11,1729.7 J6.4
NetJ6_14: J6.14 R7.1 U3.1 | length 1060.2
  Top Layer w10: J6.14 1218.11,1364.26 1297.37,1285 1565,1285 1595,1255 1830,1255 1950,1375 U3.1 R7.1
NetJ6_15: J6.15 R8.1 U3.7 | length 842.4
  Top Layer w10: J6.15 1262.38,1516.58 1262.38,1342.62 1296,1309 1564,1309 1596.96,1341.96 1596.96,1441.85 1605.1,1450 R8.1 U3.7
NetJP1_2: JP1.2 U5.7 | length 238
  Top Layer w10: U5.7 2658.09,2350 2700,2308.09 JP1.2
NetJP1_3: JP1.3 U5.6 | length 329.5
  Top Layer w10: U5.6 2658.09,2400 2800,2258.09 JP1.3
NetJP2_2: JP2.2 R13.2 U6.7 | length 387.9
  Top Layer w10: U6.7 3058.09,2350 3150,2258.09 JP2.2 3220.47,2079.53 R13.2
NetJP2_3: JP2.3 R13.1 U6.6 | length 462.4
  Top Layer w10: U6.6 3058.09,2400 3250,2208.09 JP2.3 3250,2145.42 3279.53,2115.89 R13.1
NetJP3_1: JP3.1 R14.2 | length 120.5
  Top Layer w10: JP3.1 R14.2
NetJP4_1: JP4.1 R15.1 | length 220.5
  Top Layer w10: JP4.1 R15.1
NetL2_1: L2.1 U2.6 | length 342
  Top Layer w20: L2.1 2428.9,1650 2478.9,1600 U2.6
NetL3_1: L3.1 U2.4 | length 645.5
  Top Layer w20: L3.1 2650,1900 U2.4
NetR5_1: R5.1 U1.21 | length 114.2
  Top Layer w10: R5.1 2003.94,2270.47 2013.58,2260.83 U1.21
NetR6_2: R6.2 U1.11 | length 133.1
  Top Layer w10: U1.11 2070.35,1961.42 2090.27,1941.5 2109.73,1941.5 2118.23,1950 R6.2
NetR7_2: R7.2 R9.2 U3.2 | length 204.9
  Top Layer w10: U3.2 R9.2 2070.47,1446.06 2087.82,1428.72 2088.81,1428.72 2104.81,1412.72 2120.75,1412.72 2129.53,1403.94 R7.2
NetR8_2: R8.2 R11.2 U3.6 | length 192.3
  Top Layer w10: R8.2 1570.47,1453.94 1579.25,1462.72 1595.19,1462.72 1611.19,1478.72 1612.18,1478.72 1629.53,1496.06 R11.2 U3.6
NetR10_2: R10.2 U3.3 | length 120.5
  Top Layer w10: U3.3 R10.2
NetR12_2: R12.2 U3.5 | length 107.9
  Top Layer w10: R12.2 U3.5
R_OUT: J6.5 U1.6 | length 717.3
  Top Layer w10: J6.5 1415.99,1832.6 1474.59,1774 1809,1774 1934.84,1899.84 U1.6
SCLK: J3.6 U1.12 | length 1116.2
  Top Layer w10: U1.12 2086.65,1981.1 2099.25,1968.5 v1(2103.31,1968.5)
  Bottom Layer w10: v1(2103.31,1968.5) 2107.35,1972.55 2107.55,1972.55 2140,2005 J3.6
SHUTTER: J4.8 R17.2 U4.4 | length 555.9
  Top Layer w10: U4.4 R17.2 2420.47,2753.94 2461.54,2795 2595,2795 J4.8
SHUTTER_DRV: J6.13 U4.5 | length 1033.4
  Top Layer w20: J6.13 1342.51,2702.2 1360.81,2683.9 1361.1,2683.9 1440,2605 1845,2605 1910,2670 1910,2793.28 1921.72,2805 2076.02,2805 2087.74,2793.28 2087.74,2779.96 2117.69,2750 U4.5
SYNC_IN: D1.2 D2.1 J4.6 R15.2 | length 445.6
  Top Layer w10: D2.1 2942.52,2800 3022.05,2879.53 R15.2 ; J4.6 3050,2950 R15.2 ; D1.2 3157.48,2800 3077.95,2879.53 R15.2
SYNC_OUT: J3.10 R14.1 | length 125.3
  Top Layer w10: J3.10 1740,2888.31 1748.78,2879.53 R14.1
X_OUT: J6.1 R9.1 U1.8 | length 1560.3
  Top Layer w10: J6.1 1332.72,1395 1430,1395 1485,1450 1485,1725 1500,1740 1825,1740 1974.21,1889.21 U1.8 ; 1971.28,1886.28 1971.28,1718.72 2095.25,1594.75 2095.25,1487.22 2111.82,1470.66 2112.81,1470.66 2129.53,1453.94 R9.1
Y_OUT: J6.2 R11.1 U1.7 | length 1479
  Top Layer w10: R11.1 1570.47,1496.06 1561.69,1487.28 1557.76,1487.28 1395.47,1325 1305,1325 1278.38,1351.62 1278.38,1454.95 J6.2 1411.5,1506.5 1465,1560 1465,1730 1493,1758 1815.63,1758 1954.53,1896.9 U1.7
pads on no net: J1.1 J1.7 J1.8 J2.1 J2.2 J2.3 J2.4 J2.5 J2.6 J3.1 J3.8 J3.9 J4.3 J4.4 J4.5 J5.1 J5.2 J5.3 J5.4 J5.5 J6.11 J6.12 J6.24 U1.1 U1.2 U1.3 U1.4 U1.22 U1.27 U1.28 U1.29 U1.30 U4.1 U4.8 U5.1

## Polygon pours and split planes (outlines as drawn)
GND on Top Layer "GND_L01_P000" (solid, remove dead copper, pour order 0): 900,1000 900,3100 3540,3100 3600,3040 3600,2600 3700,2500 3700,1200 3600,1100 3600,1039.37 3560.63,1000
GND on Bottom Layer "GND_L04_P001" (solid, remove dead copper, pour order 1): 900,1000 900,3100 3540,3100 3600,3040 3600,2600 3700,2500 3700,1200 3600,1100 3600,1039.37 3560.63,1000
GND on Int1 (GND) (split plane): 3579.9,3031.68 3579.9,2590 3580.29,2586.08 3581.43,2582.31 3583.29,2578.83 3585.79,2575.79 3679.9,2481.68 3679.9,1208.32 3585.79,1114.21 3583.29,1111.17 3581.43,1107.69 3580.29,1103.92 3579.9,1100 3579.9,1039.37 3579.95,1038.91 3579.62,1035.59 3578.52,1031.96 3576.73,1028.61 3574.32,1025.68 3571.39,1023.27 3568.04,1021.48 3564.41,1020.38 3561.09,1020.05 3560.63,1020.1 920.1,1020.1 920.1,3079.9 3531.68,3079.9
5V on Int2 (PWR) (split plane): 3579.9,3031.68 3579.9,2590 3580.29,2586.08 3581.43,2582.31 3583.29,2578.83 3585.79,2575.79 3679.9,2481.68 3679.9,1208.32 3585.79,1114.21 3583.29,1111.17 3581.43,1107.69 3580.29,1103.92 3579.9,1100 3579.9,1039.37 3579.95,1038.91 3579.62,1035.59 3578.52,1031.96 3576.73,1028.61 3574.32,1025.68 3571.39,1023.27 3568.04,1021.48 3564.41,1020.38 3561.09,1020.05 3560.63,1020.1 920.1,1020.1 920.1,3079.9 3531.68,3079.9
9V on Int2 (PWR) (split plane): 1590.1,2331.38 1589.91,2330 1589.91,1600 1590.26,1597.39 1591.27,1594.96 1592.87,1592.87 1594.96,1591.27 1597.39,1590.26 1600,1589.91 2000,1589.91 2002.61,1590.26 2005.04,1591.27 2007.13,1592.87 2008.73,1594.96 2009.74,1597.39 2010.09,1600 2010.09,1645.82 2054.18,1689.91 2250,1689.91 2252.61,1690.26 2255.04,1691.27 2257.13,1692.87 2279.18,1714.91 2489.91,1714.91 2489.91,1460.09 2060,1460.09 2057.39,1459.74 2054.96,1458.73 2052.87,1457.13 2051.26,1455.04 2050.26,1452.61 2049.91,1450 2049.91,1210.09 1654.18,1210.09 1480.09,1384.18 1480.09,2349.91 1571.56,2349.91
3V3 on Int2 (PWR) (split plane): 2037.87,2387.87 2039.96,2386.26 2042.39,2385.26 2045,2384.91 2289.91,2384.91 2289.91,2250 2290.26,2247.39 2291.26,2244.96 2292.87,2242.87 2294.96,2241.26 2297.39,2240.26 2300,2239.91 2639.91,2239.91 2639.91,1360.09 2450,1360.09 2447.39,1359.74 2444.96,1358.73 2442.87,1357.13 2441.26,1355.04 2440.26,1352.61 2439.91,1350 2439.91,1150 2439.91,1060.09 2340.09,1060.09 2340.09,1200 2339.74,1202.61 2338.74,1205.04 2337.13,1207.13 2335.04,1208.73 2332.61,1209.74 2330,1210.09 2070.09,1210.09 2070.09,1439.91 2500,1439.91 2502.61,1440.26 2505.04,1441.27 2507.13,1442.87 2508.74,1444.96 2509.74,1447.39 2510.09,1450 2510.09,2100 2509.74,2102.61 2508.74,2105.04 2507.13,2107.13 2505.04,2108.74 2502.61,2109.74 2500,2110.09 2250,2110.09 2247.39,2109.74 2244.96,2108.74 2242.87,2107.13 2241.26,2105.04 2240.26,2102.61 2239.91,2100 2239.91,1810.09 1910.09,1810.09 1910.09,2414.91 2010.82,2414.91
-9V on Int2 (PWR) (split plane): 1739.91,2291.25 1740.26,2288.64 1741.27,2286.21 1742.87,2284.12 1754.91,2272.07 1754.91,2204.18 1742.87,2192.13 1741.27,2190.04 1740.26,2187.61 1739.91,2185 1739.91,2175 1739.91,2088.44 1711.56,2060.09 1675,2060.09 1672.39,2059.74 1669.96,2058.74 1667.87,2057.13 1666.27,2055.04 1665.26,2052.61 1664.91,2050 1664.91,2025 1664.91,2000 1664.91,1955 1665.26,1952.39 1666.27,1949.96 1667.87,1947.87 1669.96,1946.27 1672.39,1945.26 1675,1944.91 1715.82,1944.91 1722.78,1937.95 1724.87,1936.35 1727.3,1935.34 1729.91,1935 1745.82,1935 1752.95,1927.87 1759.91,1920.91 1759.91,1810 1760.26,1807.39 1761.27,1804.96 1762.87,1802.87 1772.87,1792.87 1774.96,1791.27 1776.68,1790.55 1777.39,1790.26 1780,1789.91 2250,1789.91 2252.61,1790.26 2255.04,1791.27 2257.13,1792.87 2258.74,1794.96 2259.74,1797.39 2260.09,1800 2260.09,2089.91 2489.91,2089.91 2489.91,1735.09 2275,1735.09 2272.39,1734.74 2271.68,1734.45 2269.96,1733.73 2267.87,1732.13 2245.82,1710.09 2050,1710.09 2047.39,1709.74 2046.17,1709.24 2044.96,1708.73 2042.87,1707.13 1992.87,1657.13 1991.27,1655.04 1990.26,1652.61 1989.91,1650 1989.91,1610.09 1610.09,1610.09 1610.09,2319.91 1739.91,2319.91

## Keep-outs
Keep-Out Layer:
  the board outline again, w25

## Other copper
Int2 (PWR) (plane layer: these items are gaps in the copper):
  lines w20: 1600,2330 1600,1600 2000,1600 2000,1650 2050,1700 2250,1700 2275,1725 2500,1725 ; 1675,2000 1675,2050 1715.74,2050 1750,2084.26 1750,2175 1750,2185 1765,2200 1765,2276.25 1750,2291.25 1750,2330 1605.74,2330 1575.74,2360 1470,2360 1470,1380 1650,1200 2060,1200 ; 1675,2025 1675,1955 1720,1955 1729.91,1945.09 1750,1945.09 1760.09,1935 1770,1925.09 1770,1810 1780,1800 1900,1800 ; 2439.91,1050 2330,1050 2330,1200 2060,1200 ; 2450,1050 2450,1150 2450,1350 2650,1350 2650,2250 2300,2250 2300,2395 2185,2395 2045,2395 2015,2425 1900,2425 1900,1800 ; 1900,1800 2250,1800 2250,2100 2500,2100 2500,1450 2060,1450 2060,1200

## Silkscreen, mask and mechanical layers (free items; w line width, h text height)
Top Overlay:
  lines w5: 1600,1970 1615,1985 ; 1605,2090 1615,2080
  text "SYNC IN" at 2620,2570 h50
  text "SYNC OUT" at 1520,2525 h50
  text "DMX" at 2630,2015 h50
  text "DMX" at 3010,2015 h50
  text "OUT" at 2630,1940 h50
  text "IN" at 3035,1940 h50
  text "http://Scrootch.Me" at 2840,1368.5 h100
  text ".ProjectTitle" at 3020,1305 h30
  text "BMC" at 2825.78,1273.67 h120
  text "Rev: .ProjectRevision" at 3020,1255 h30
Board Outline:
  the board outline again, w10